# EAGLE board power-dist-board (EAGLE 9.2.2)
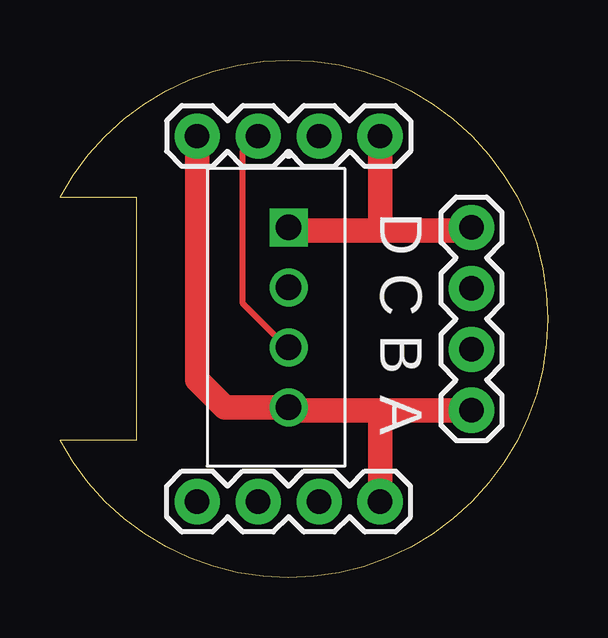
[diagram p0: board, top side]
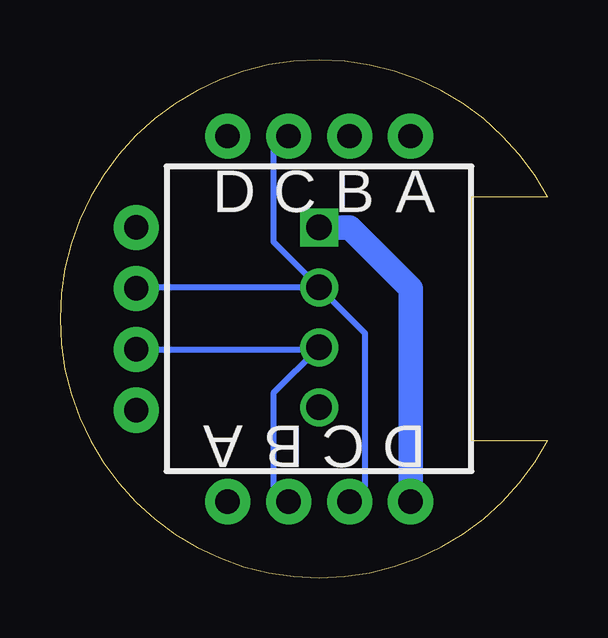
[diagram p1: board, bottom side, seen from below]

Size 20.32 x 21.59 mm. Coordinates in mm from the lower left corner, seen from the top.
Outline: 0,15.87 arc-152 20.32,10.79 arc-152 0,5.71 3.18,5.71 3.18,15.87 0,15.87
Copper layers (1*16): Top 0.035mm / dielectric 1.5mm / Bottom 0.035mm
Design rules "default": minimum track width 6mil, minimum drill 0.35mm, track to track 6mil, track to pad 6mil, pad to pad 6mil, via to via 6mil, smd to smd 6mil, copper to edge 40mil, drill to drill 6mil, minimum pad ring 10mil, minimum via ring 8mil, stop-mask expansion 4mil, vias tented up to drill 0mil, thermal gap 10mil

## Footprints (pad centres in the part's own frame; a part is rotated, then mirrored left to right if it is on the bottom)
1X04 = drill 1.016 pad 1.88: 1 0,0; 2 2.54,0; 3 5.08,0; 4 7.62,0
JST_B4B-XH-A(LF)(SN) = drill 1.06 square: 1 0,0 | drill 1.06: 2 2.5,0; 3 5,0; 4 7.5,0

## Placement (x,y rotation side)
J1  [1X04]  5.71,18.41 0 top
J2  [1X04]  13.34,3.17 180 top
J3  B4B-XH-A(LF)(SN)  [JST_B4B-XH-A(LF)(SN)]  9.53,14.6 270 top
J4  [1X04]  17.14,6.98 90 top

## Library data of the parts
J1 J2 J4 = RoverWing-cover-V1.6; PROD_ID: CONN-09696
J3 = RoverWing-V1.5; DESCRIPTION: Connector Header Through Hole 4 position 0.098 (2.50mm); DIGI-KEY_PART_NUMBER: 455-2249-ND; DIGIKEY-PURCHASE-URL: https://snapeda.com/shop?store=DigiKey&id=447494; MF: JST Sales; MP: B4B-XH-A(LF)(SN); PACKAGE: None

## Nets
A: J1.1 J2.1 J3.4 J4.1
B: J1.2 J2.2 J3.3 J4.2
C: J1.3 J2.3 J3.2 J4.3
D: J1.4 J2.4 J3.1 J4.4

## Tracks (layer width: path | path; a pad name or v marks a point on that pad's centre or on a via)
A
  Top 1.016: 13.34,6.98 J4.1 | J2.1 13.34,6.98 | 13.34,6.98 9.64,6.98 J3.4 6.87,7.1 5.71,8.25 J1.1
B
  Top 0.254: J1.2 7.62,17.78 7.62,11.43 9.45,9.6 J3.3
  Bottom 0.254: J2.2 11.43,3.81 11.43,7.7 J3.3 9.61,9.52 J4.2
C
  Bottom 0.254: J3.2 11.43,14.01 11.43,17.78 J1.3 | J2.3 7.62,3.81 7.62,10.2 J3.2 | J3.2 17.11,12.1 J4.3
D
  Top 1.016: 13.34,14.48 9.64,14.48 J3.1 | 13.34,14.48 17.02,14.48 J4.4 | J1.4 13.34,14.48
  Bottom 1.016: J3.1 8.26,14.6 5.71,12.06 J2.4

## Text on the board
tNames: D | C | B | A
bNames: A | B | C | D | D | C | B | A